# EAGLE board Mosquito1 (EAGLE 6.4)
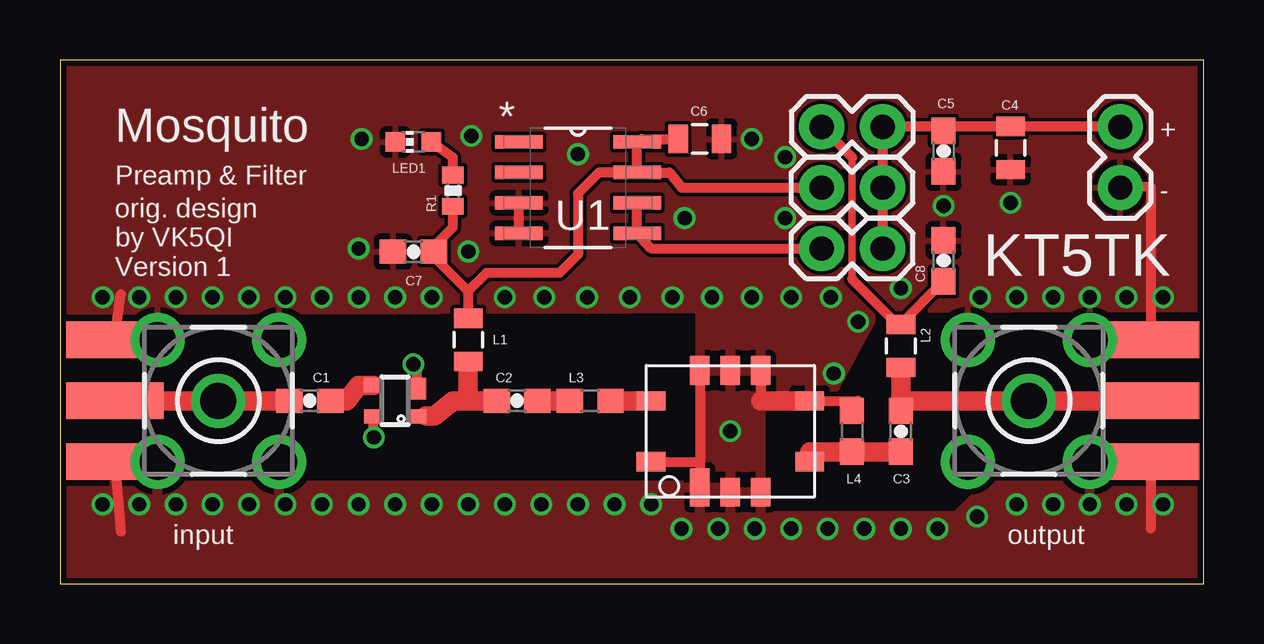
[diagram p0: board, top side]
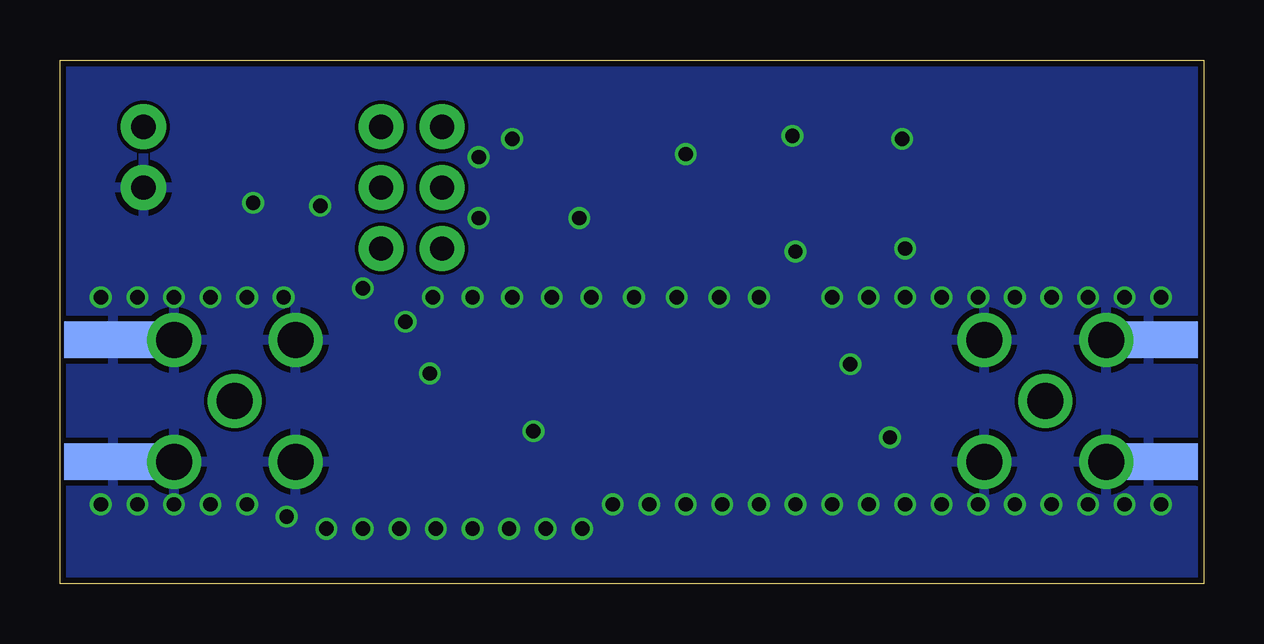
[diagram p1: board, bottom side, seen from below]

Size 47.68 x 21.83 mm. Coordinates in mm from the lower left corner, seen from the top.
Outline: 0,0 47.68,0 47.68,21.83 0,21.83 0,0
Copper layers (1*16): Top 0.035mm / dielectric 1.5mm / Bottom 0.035mm
Design rules "Fusion_eagle_rule_v1.1": minimum track width 6mil, minimum drill 12mil, track to track 6mil, track to pad 6mil, pad to pad 6mil, via to via 6mil, smd to smd 0mil, copper to edge 10mil, drill to drill 10mil, minimum pad ring 10mil, minimum via ring 6mil, stop-mask expansion 2mil, vias tented up to drill 100mil, thermal gap 10mil

## Footprints (pad centres in the part's own frame; a part is rotated, then mirrored left to right if it is on the bottom)
0603-CAP = smd 1.1 x 1: 1 -0.85,0; 2 0.85,0
0805 = smd 0.8 x 1.2: 1 -0.9,0; 2 0.9,0
SMA-EDGE = smd 1.524 x 4.064: GND@0 -2.54,0; GND@1 2.54,0; SIG 0,0 | smd 1.524 x 4.064 bottom: GND@2 -2.54,0; GND@3 2.54,0
1X02 = drill 1.016 pad 1.88: 1 0,0; 2 2.54,0
0603 = smd 1.1 x 1: 1 -0.85,0; 2 0.85,0
CHIP-LED0603 = smd 0.8 x 0.8: A 0,-0.75; C 0,0.75
0402-RES = smd 0.7 x 0.9: 1 -0.65,0; 2 0.65,0
TRIQUINT_856929 = smd 0.8 x 1.6: 1 -1.27,-2.34 | smd 0.8 x 1.2: 2 0,-2.54; 3 1.27,-2.54; 6 1.27,2.54; 7 0,2.54; 8 -1.27,2.54 | smd 1.2 x 0.8: 4 3.31,-1.27; 5 3.31,1.27; 9 -3.31,1.27; 10 -3.31,-1.27
SOIC127P600X175-8N = smd 1.981 x 0.559: 1 -2.464,1.905; 2 -2.464,0.635; 3 -2.464,-0.635; 4 -2.464,-1.905; 5 2.464,-1.905; 6 2.464,-0.635; 7 2.464,0.635; 8 2.464,1.905
PSA4-5043+ = smd 0.6 x 0.8: 1 -0.65,-0.9; 3 0.65,0.9; 4 -0.65,0.9 | smd 0.9 x 0.8: 2 0.5,-0.9
LTI-SASF54GT = drill 1.5 pad 2.2: 1 0,0; 2 -2.54,2.54; 3 2.54,2.54; 4 2.54,-2.54; 5 -2.54,-2.54

## Placement (x,y rotation side)
C1  150pF  [0603-CAP]  10.41,7.62 0 top
C2  1000pF  [0603-CAP]  19.05,7.62 0 top
C3  150pF  [0603-CAP]  35.05,6.35 90 top
C4  4.7µF  [0805]  39.62,18.16 270 top
C5  0.1µF  [0603-CAP]  36.83,18.03 270 top
C6  4.7µF  [0805]  26.67,18.54 0 top
C7  0.1µF  [0603-CAP]  14.73,13.84 180 top
C8  0.1µF  [0603-CAP]  36.83,13.46 90 top
IN  SMA_EDGE  [SMA-EDGE]  2.29,7.62 90 top
JP1  [1X02]  31.75,19.05 0 top
JP2  [1X02]  34.29,16.51 180 top
JP3  [1X02]  34.29,13.97 180 top
JP4  [1X02]  44.2,16.51 90 top
L1  BMB2A1000BN3  [0805]  17.02,10.16 270 top
L2  BMB2A1000BN3  [0805]  35.05,9.91 270 top
L3  150nH  [0603]  22.1,7.62 0 top
L4  22nH  [0603]  33.02,6.35 90 top
LED1  [CHIP-LED0603]  14.73,18.41 90 top
OUT  SMA_EDGE  [SMA-EDGE]  45.47,7.62 90 top
R1  330  [0402-RES]  16.38,16.38 90 top
SAW  856929  [TRIQUINT_856929]  27.94,6.35 0 top
U1  TPS76633D  [SOIC127P600X175-8N]  21.59,16.51 0 top
U$2  PSA4-5043+  [PSA4-5043+]  13.97,7.62 90 top
X1  LTI-SASF54GT  [LTI-SASF54GT]  6.6,7.62 90 top
X2  LTI-SASF54GT  [LTI-SASF54GT]  40.39,7.62 0 top

## Library data of the parts
C1-C8 JP1-JP4 L1 L2 = SparkFun
IN = SparkFun; RFSUPPLIER: http://www.rfsupplier.com/hole-panel-mount-jack-with-solder-post-terminal-p-2365.html
L3 L4 R1 = SparkFun-Passives
LED1 = adafruit
OUT = SparkFun; RFSUPPLIER: http://www.rfsupplier.com/hole-panel-mount-plug-with-solder-post-terminal-short-vers-p-1731.html
SAW = KT5TK
U1 = Ava; DESCRIPTION: ULTRALOW QUIESCENT CURRENT 250-mA LOW DROPOUT VOLTAGE REGULATORS; MPN: TPS76633D; OC_FARNELL: 8461422; OC_NEWARK: 77C1060; PACKAGE: SOIC-8; SUPPLIER: Texas Instruments
U$2 = Ava
X1 X2 = con-coax; OC_FARNELL: unknown; OC_NEWARK: unknown

## Nets
GND: C4.2 C5.2 C6.2 C7.2 C8.2 IN.GND@0 IN.GND@1 IN.GND@2 IN.GND@3 JP4.1 L4.2 LED1.C OUT.GND@0 OUT.GND@1 OUT.GND@2 OUT.GND@3 SAW.1 SAW.2 SAW.3 SAW.5 SAW.6 SAW.7 SAW.8 SAW.10 U1.3 U1.4 U$2.2 U$2.4 X1.2 X1.3 X1.4 X1.5 X2.2 X2.3 X2.4 X2.5
N$1: C1.1 IN.SIG X1.1
N$2: C1.2 U$2.3
N$3: C4.1 C5.1 JP1.2 JP2.1 JP3.1 JP4.2
N$4: C2.1 L1.2 U$2.1
N$5: C2.2 L3.1
N$6: C3.2 L2.2 OUT.SIG X2.1
N$7: LED1.A R1.2
N$8: C8.1 JP1.1 L2.1
N$9: C6.1 C7.1 JP2.2 L1.1 R1.1 U1.7 U1.8
N$10: JP3.2 U1.5 U1.6
N$11: C3.1 L4.1 SAW.4
N$12: L3.2 SAW.9

## Tracks (layer width: path | path; a pad name or v marks a point on that pad's centre or on a via)
GND  (via drill 0.6)
  Top 0.406: U1.4 U1.3 | SAW.8 26.67,5.08 | 26.67,5.08 SAW.1 | SAW.6 29.22,7.62 | SAW.10 26.67,5.08 | SAW.5 33.27,7.62 L4.2 | v13.08,6.1 13.07,6.99 U$2.4 | v14.73,9.14 14.87,9.14 U$2.2 | JP4.1 45.47,16.55 OUT.GND@1 | IN.GND@2 2.54,2.16 | IN.GND@1 2.54,12.06 | OUT.GND@0 45.47,2.29
  Top 0.813: 29.22,7.62 SAW.5
  other vias: 39.62,15.88 32.26,8.76 1.78,11.94 3.3,11.94 4.83,11.94 6.35,11.94 7.87,11.94 9.4,11.94 10.92,11.94 12.45,11.94 13.97,11.94 15.49,11.94 18.54,11.94 20.19,11.94 21.97,11.94 23.75,11.94 25.53,11.94 27.18,11.94 28.83,11.94 30.48,11.94 32.13,11.94 33.27,10.92 30.23,17.78 38.35,11.94 39.88,11.94 41.4,11.94 1.78,3.3 3.3,3.3 4.83,3.3 6.35,3.3 7.87,3.3 9.4,3.3 10.92,3.3 12.45,3.3 13.97,3.3 15.49,3.3 17.02,3.3 18.54,3.3 20.07,3.3 21.59,3.3 23.11,3.3 24.64,3.3 38.23,2.79 30.48,2.29 32,2.29 33.53,2.29 35.05,2.29 36.58,2.29 39.88,3.3 41.4,3.3 30.23,15.24 36.83,15.75 42.93,11.94 44.45,11.94 45.97,11.94 42.93,3.3 44.45,3.3 45.97,3.3 26.04,15.24 21.59,17.91 28.96,2.29 27.43,2.29 25.91,2.29 27.94,6.35 35.05,12.32 17.02,13.84 28.83,18.54 17.14,18.67 12.57,18.54 12.45,13.97
  pour Bottom: 0,0 47.62,0 47.62,21.84 0,21.84
  pour Top: 0,21.84 47.62,21.84 47.62,11.43 0,11.3
  pour Top: 26.67,2.16 29.21,2.16 29.21,11.56 26.67,11.56
  pour Top: 0,0 47.75,0 47.75,4.06 38.61,4.06 37.34,2.79 29.21,2.79 29.21,4.06 0,4.06
  pour Top: 29.21,11.43 34.04,11.43 32.26,8.13 29.21,8.13
N$1
  Top 0.813: C1.1 X1.1 IN.SIG
N$2
  Top 0.813: C1.2 11.94,7.62 12.45,8.27 U$2.3
N$3
  Top 0.406: JP4.2 36.83,19.05 | C4.1 36.83,19.05 | 36.83,19.05 C5.1 | 36.83,19.05 JP1.2 JP2.1 JP3.1
N$4
  Top 0.406: U$2.1 15.25,6.99
  Top 0.813: 15.25,6.99 15.62,6.99 16.38,7.62 17.02,7.62 | 17.02,7.62 C2.1 | 17.02,7.62 L1.2
N$5
  Top 0.813: C2.2 L3.1
N$6
  Top 0.406: C3.2 35.31,7.62
  Top 0.813: C3.2 L2.2 | 35.31,7.62 X2.1 44.96,7.62 OUT.SIG
N$7
  Top 0.406: R1.2 16.38,17.77 LED1.A
N$8
  Top 0.305: 33.02,12.7 33.02,17.78
  Top 0.406: 33.02,12.7 34.91,10.81 L2.1 35.05,10.83 C8.1 | 33.02,17.78 JP1.1
N$9
  Top 0.406: U1.7 25.4,17.14 25.91,16.51 JP2.2 | U1.7 U1.8 24.26,18.41 24.26,18.54 C6.1 | U1.7 22.48,17.14 21.59,16.26 21.59,13.72 20.83,12.95 17.78,12.95 17.02,12.19 | 17.02,12.19 L1.1 | 17.02,12.19 15.58,13.63 C7.1 15.58,14.06 16.38,14.86 R1.1
N$10
  Top 0.406: JP3.2 24.64,13.97 U1.5 U1.6
N$11
  Top 0.406: SAW.4 31.25,5.5
  Top 0.813: 31.25,5.5 L4.1 C3.1
N$12
  Top 0.813: L3.2 SAW.9

## Text on the board
tNames: + | Mosquito | Preamp & Filter | - | orig. design / by VK5QI / Version 1 | KT5TK | input | output